# Altium PCB printer_tag_device.PcbDoc (part 1 of 3)
Units mm, origin at the board's own origin, x right, y up, seen from the top; angles counter-clockwise.
Board outline 140.18 x 100.02 mm, 2 copper layers (Top Layer, Bottom Layer); 258 components, 169 nets, 954 pads, 344 vias.
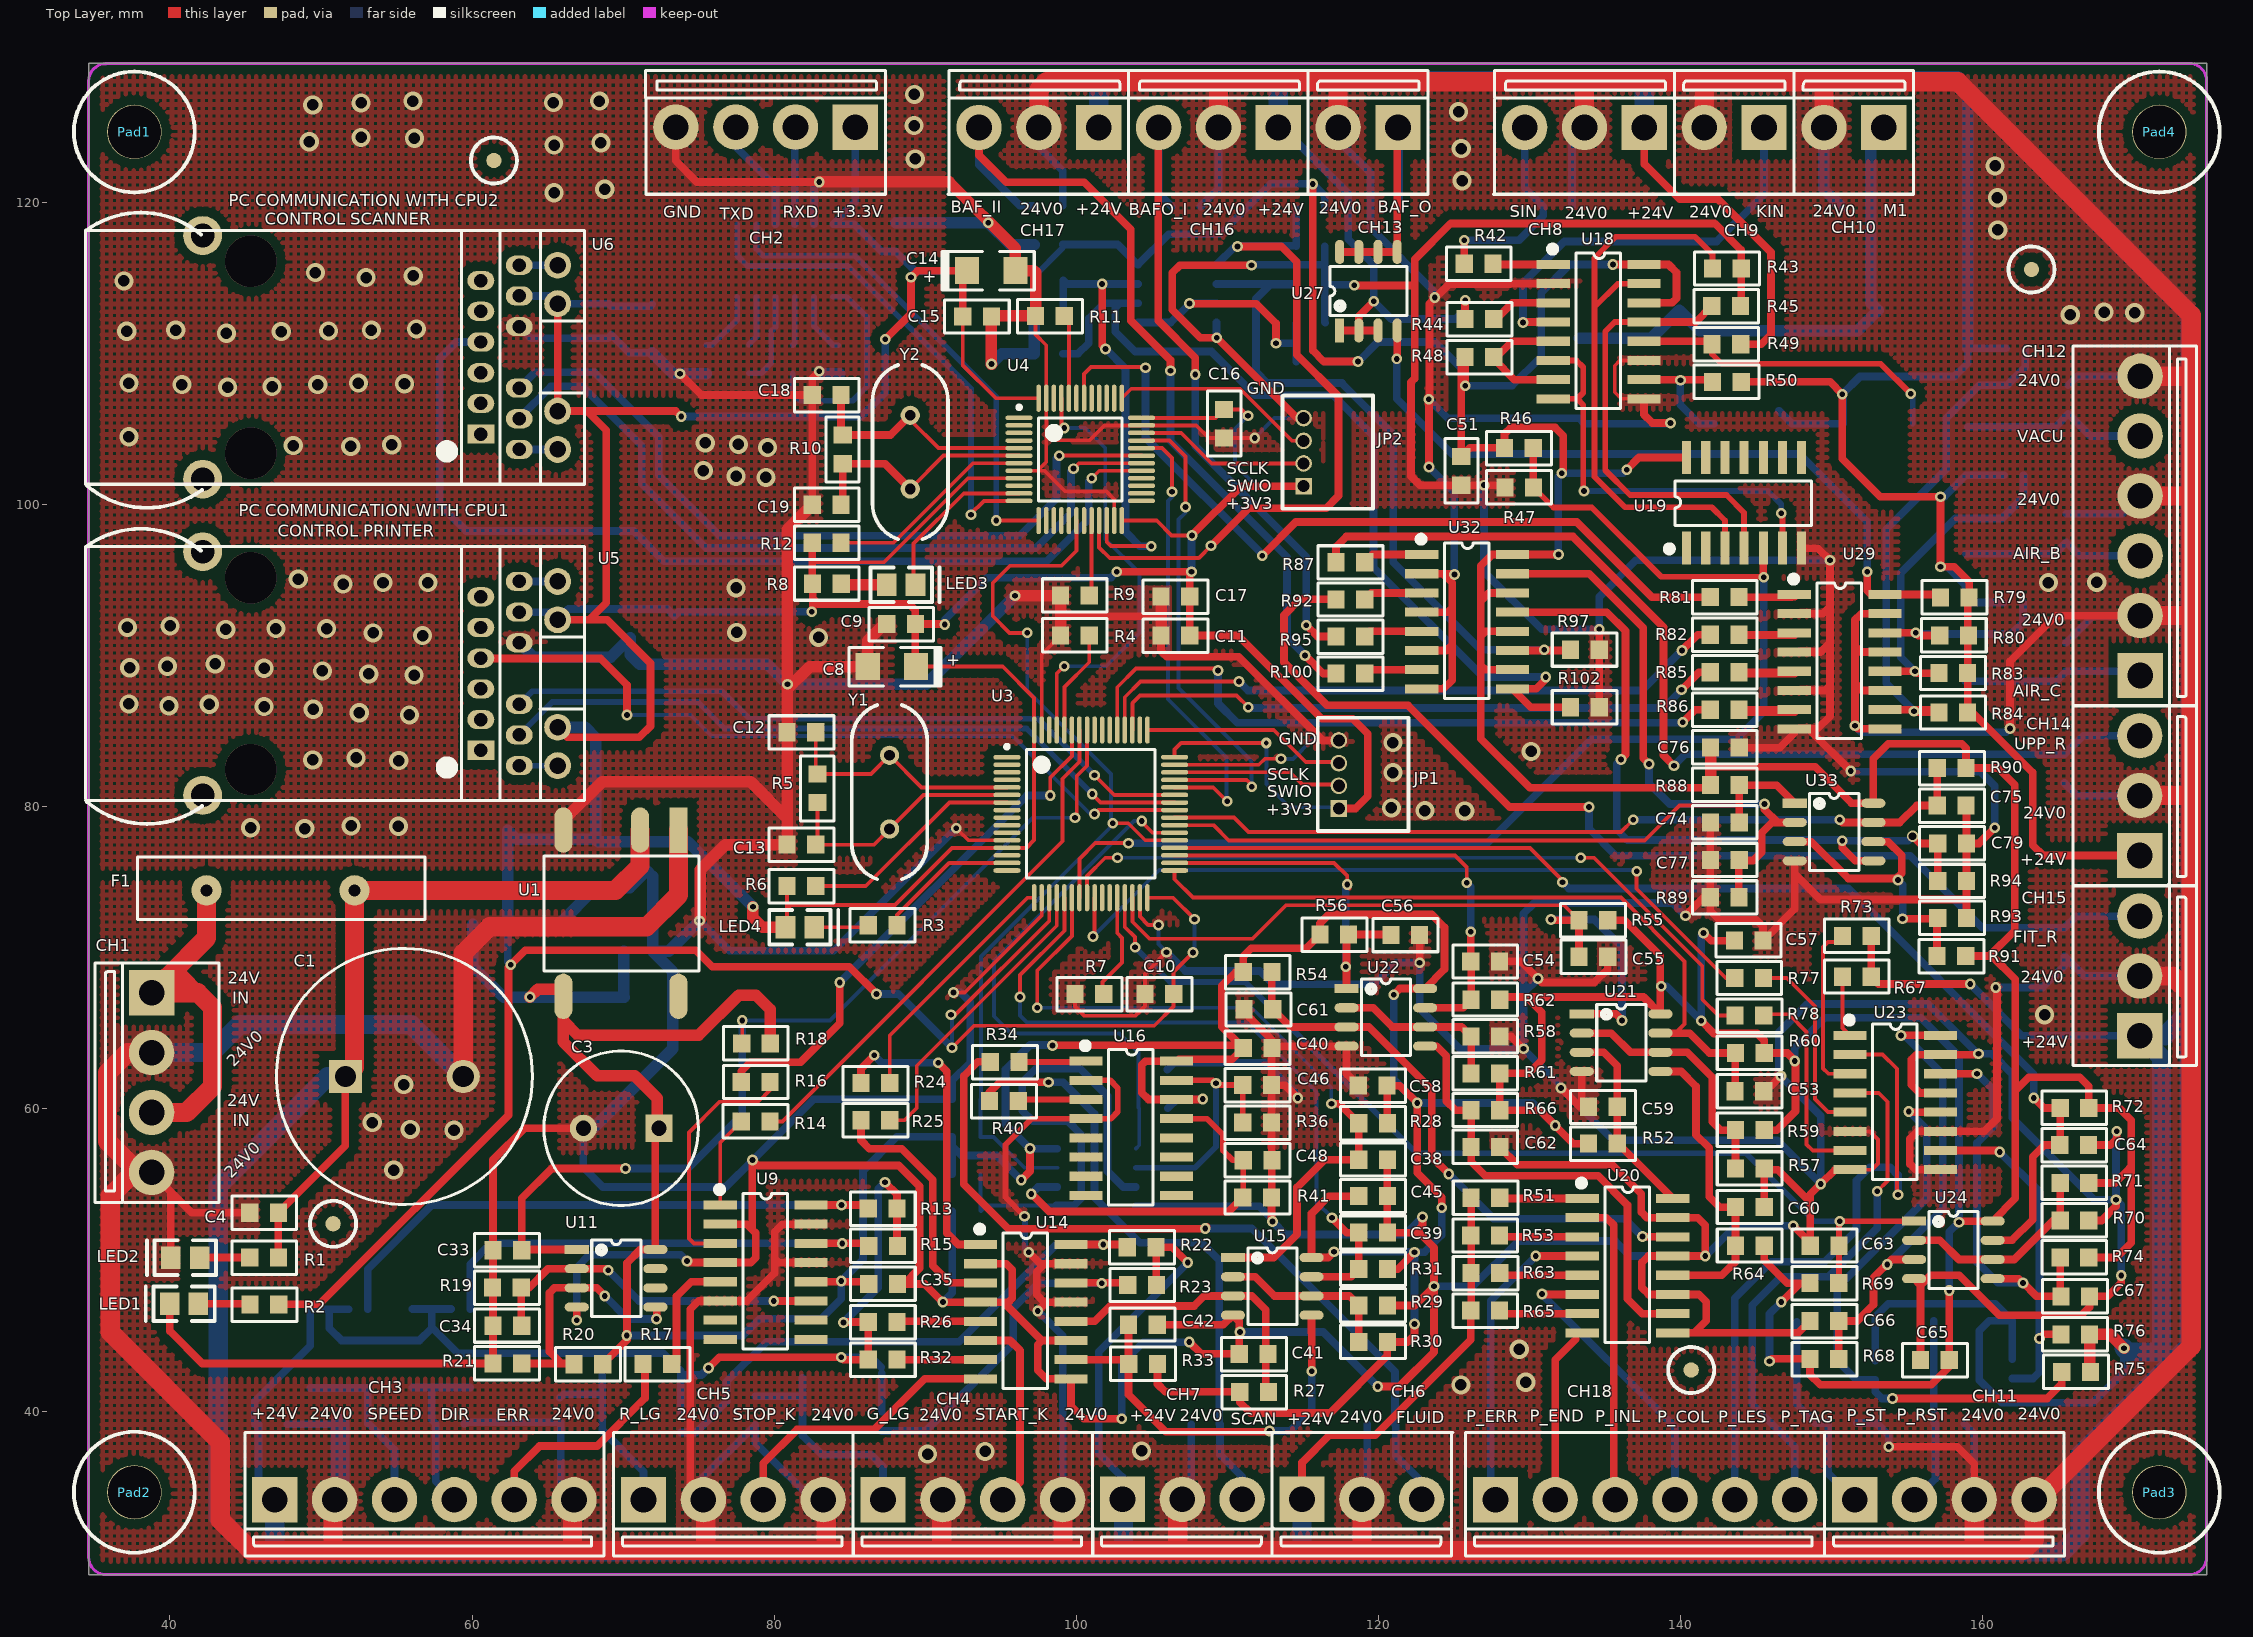
[diagram p0: Top Layer view]
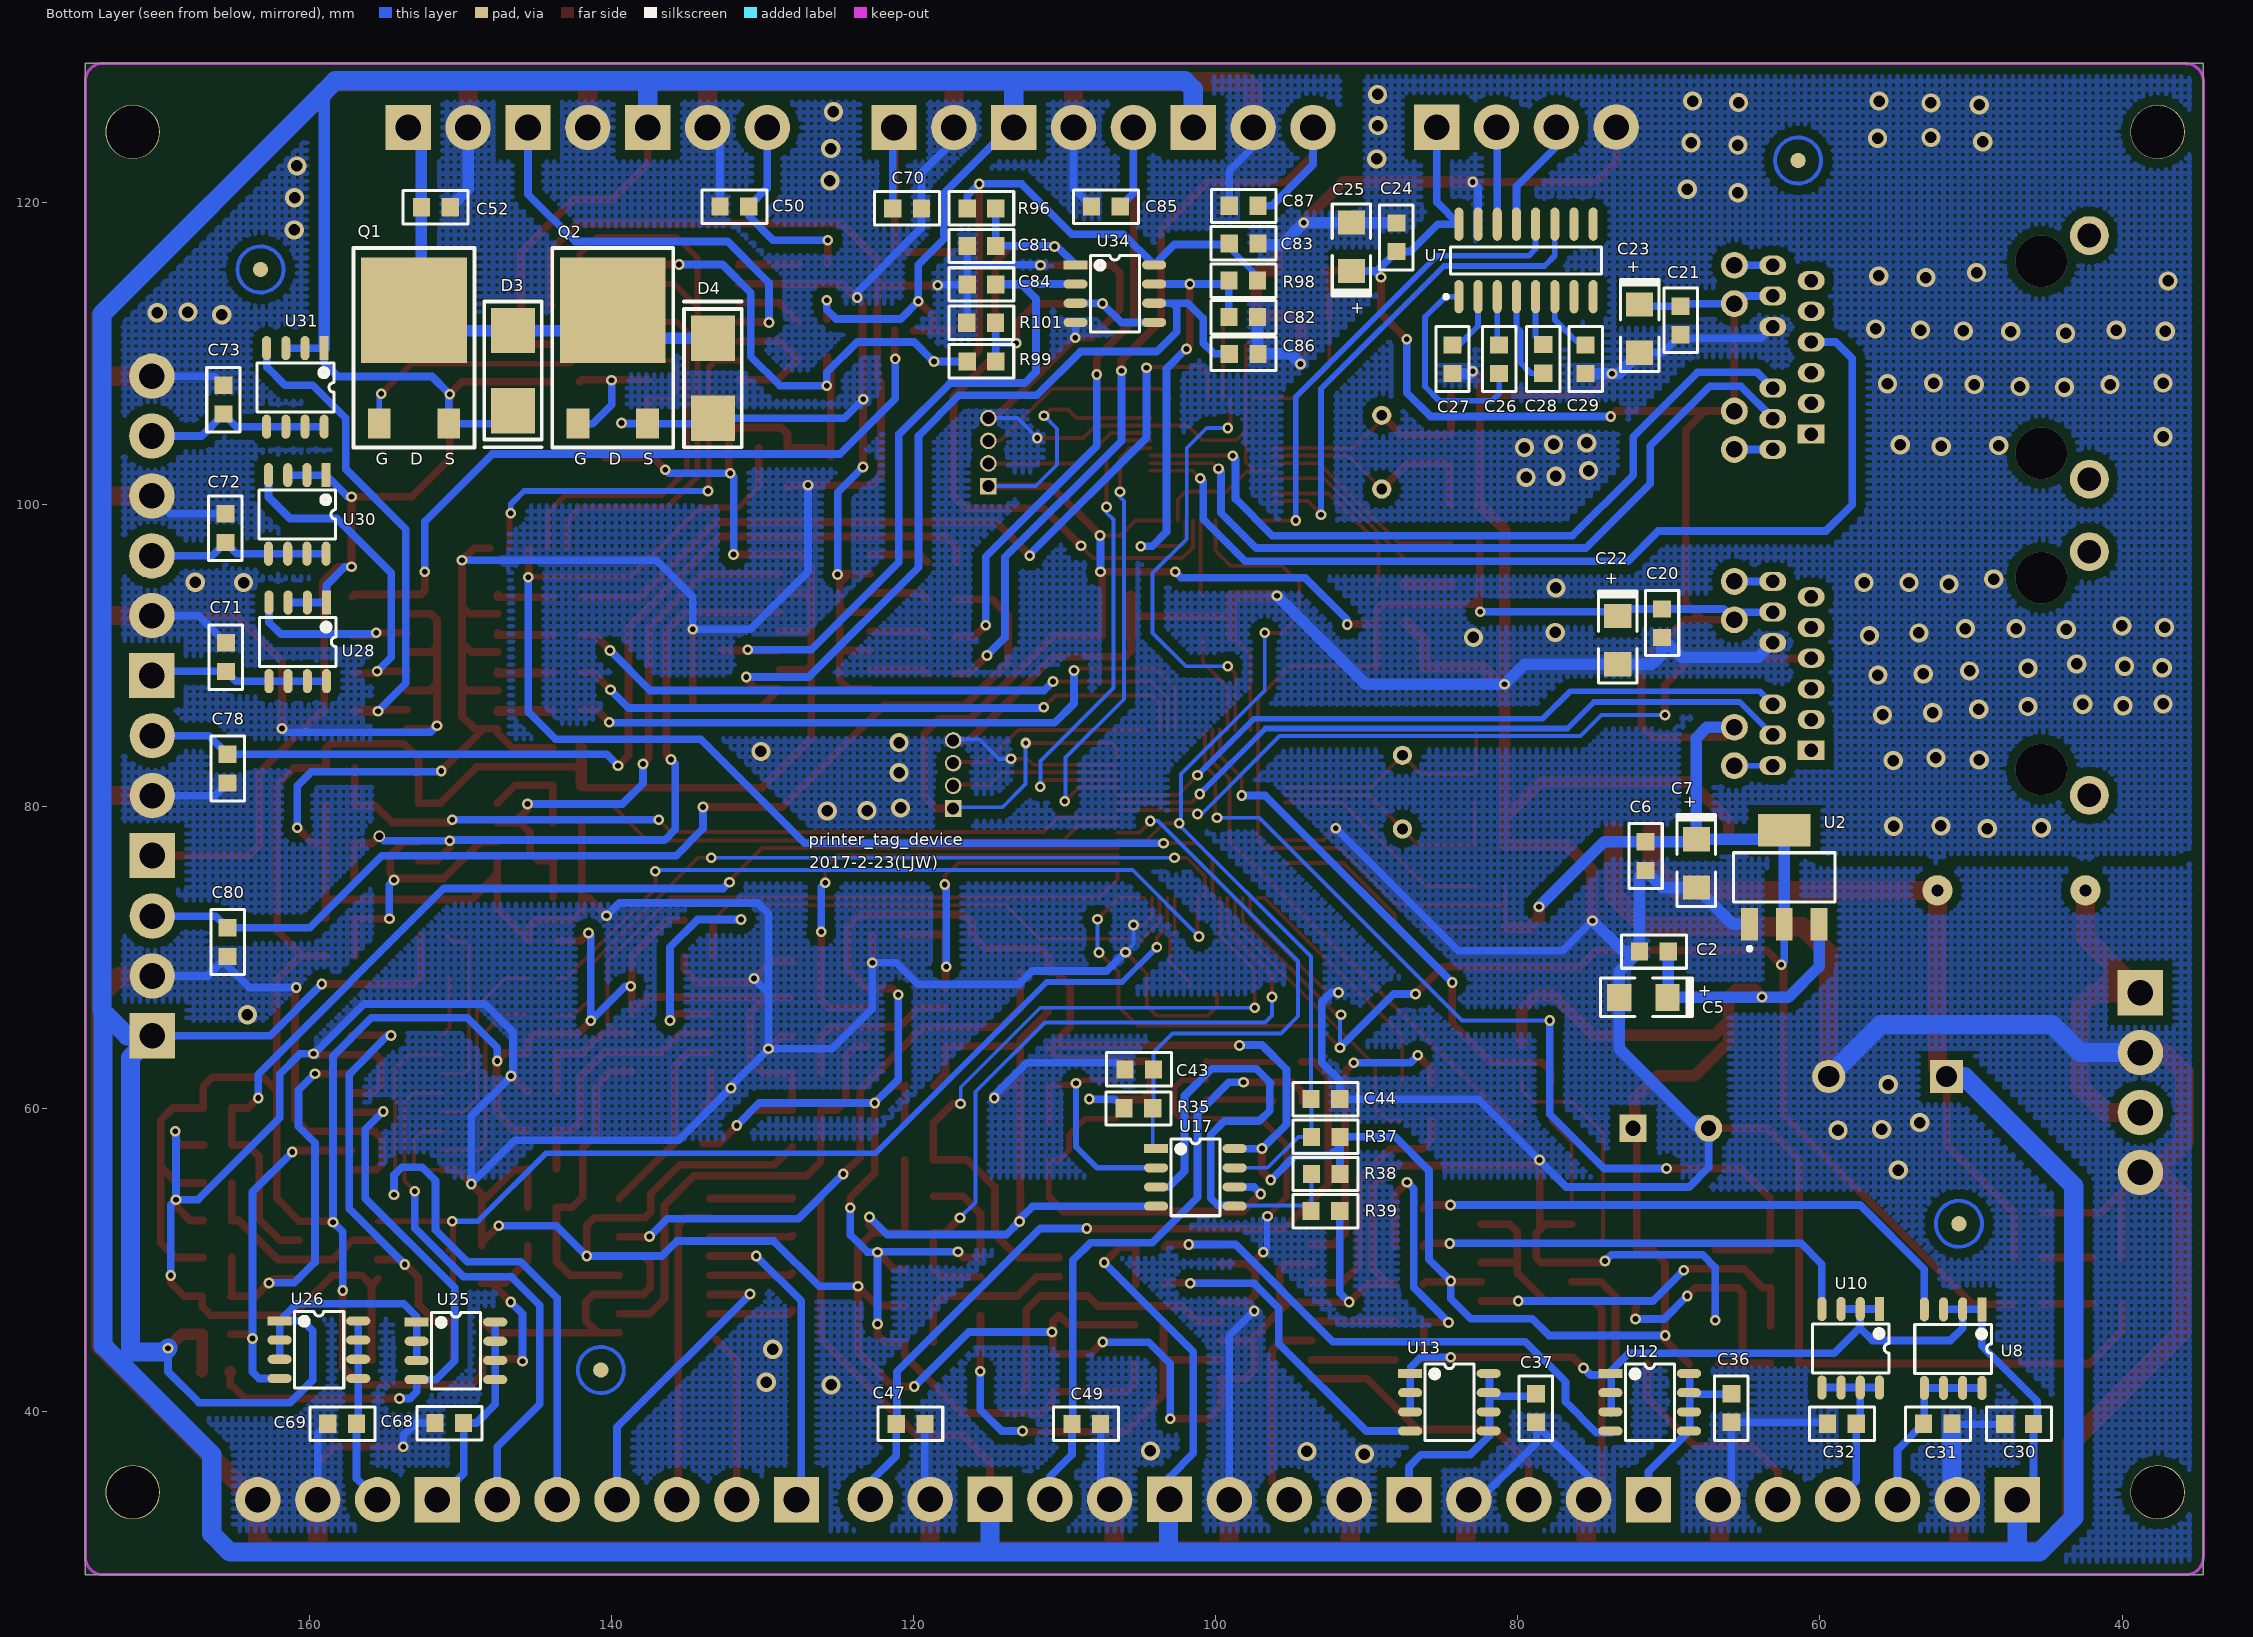
[diagram p1: Bottom Layer view, seen from below]

## Layer stack, top to bottom
Top Solder: solder mask 0.0102, Solder Resist, Dk 3.5
Top Layer: signal copper 0.0356
Dielectric 1: dielectric 0.32, FR-4, Dk 4.8
Bottom Layer: signal copper 0.0356
Bottom Solder: solder mask 0.0102, Solder Resist, Dk 3.5

## Board outline
34.62,29.185 34.62,129.204 174.803,129.204 174.803,29.185

## Design rules (kind name [scope] priority, off if disabled: settings)
Clearance Clearance_1 [InPolygon] p1: gap=0.6
Clearance [All] p2: gap=0.152
ComponentClearance [All] p1: gap=0 collisioncheckmode=3 verticalgap=0 showdistances=FALSE
PolygonConnect [All] p1: connectstyle=Direct reliefconductorwidth=0.254 reliefentries=4 polygonreliefangle="90 Angle" airgapwidth=0.254
RoutingVias [All] p1: holewidth=0.711 width=1.27 viastyle="Through Hole" minholewidth=0.711 minwidth=1.27 maxholewidth=0.711 maxwidth=1.27
SolderMaskExpansion [All] p1: expansion=0.102
Width [All] p1: maxlimit=6 minlimit=0.254 preferedwidth=6
28 further rules are at their usual default settings.

## Classes and differential pairs
component class roll_motorl_control: C50 C51 C52 CH8 CH9 CH10 D3 D4 Q1 Q2 R42 R43 R44 R45 R46 R47 R48 R49 R50 U18 U19
component class printer_control: C53 C54 C55 C56 C57 C58 C59 C60 C61 C62 C63 C64 C65 C66 C67 C68 C69 CH11 CH18 R51 R52 R53 R54 R55 R56 R57 R58 R59 R60 R61 R62 R63 R64 R65 R66 R67 R68 R69 R70 R71 R72 R73 R74 R75 R76 R77 R78 U20 U21 U22 U23 U24 U25 U26
component class power: C1 C2 C3 C4 C5 C6 C7 CH1 F1 LED1 LED2 R1 R2 U1 U2
component class light_key_control: C36 C37 C38 C39 C40 C41 C42 C43 C44 C45 C46 C47 C48 C49 CH4 CH5 CH6 CH7 R22 R23 R24 R25 R26 R27 R28 R29 R30 R31 R32 R33 R34 R35 R36 R37 R38 R39 R40 R41 U12 U13 U14 U15 U16 U17
component class cpu: C8 C9 C10 C11 C12 C13 C14 C15 C16 C17 C18 C19 JP1 JP2 LED3 LED4 Pad1 Pad2 Pad3 Pad4 R3 R4 R5 R6 R7 R8 R9 R10 R11 R12 U3 U4 Y1 Y2
component class communition: C20 C21 C22 C23 C24 C25 C26 C27 C28 C29 CH2 U5 U6 U7
component class belt_motor_control: C30 C31 C32 C33 C34 C35 CH3 R13 R14 R15 R16 R17 R18 R19 R20 R21 U8 U9 U10 U11
component class air_cylinder_control: C70 C71 C72 C73 C74 C75 C76 C77 C78 C79 C80 C81 C82 C83 C84 C85 C86 C87 CH12 CH13 CH14 CH15 CH16 CH17 R79 R80 R81 R82 R83 R84 R85 R86 R87 R88 R89 R90 R91 R92 R93 R94 R95 R96 R97 R98 R99 R100 R101 R102 U27 U28 U29 U30 U31 U32 U33 U34

## Components (designator, comment, footprint, x,y, rotation, side; value= is the part's Value field where it differs from the comment)
C1 "C_2200uF" C7.8*17 51.613,62.154 r0 top
C2 "Cap" 0805 70.993,70.434 r180 bottom
C3 "C_2200uF" C5*10 72.365,58.725 r180 top
C4 "Cap" 0805 46.228,53.137 r0 top
C5 "Cap Pol3" "CAP A-3216" 71.679,67.386 r0 bottom
C6 "Cap" 0805 71.552,76.733 r90 bottom
C7 "Cap Pol3" "CAP A-3216" 68.174,76.251 r270 bottom
C8 "Cap Pol3" "CAP A-3216" 87.782,89.281 r180 top
C9 "Cap" 0805 88.392,92.1 r0 top
C10 "Cap" 0805 105.486,67.615 r0 top
C11 "Cap" 0805 106.553,91.338 r0 top
C12 "Cap" 0805 81.8,84.938 r0 top
C13 "Cap" 0805 81.8,77.495 r0 top
C14 "Cap Pol3" "CAP A-3216" 94.361,115.494 r0 top
C15 "Cap" 0805 93.421,112.446 r180 top
C16 "Cap" 0805 109.779,105.359 r90 top
C17 "Cap" 0805 106.553,93.929 r0 top
C18 "Cap" 0805 83.464,107.264 r0 top
C19 "Cap" 0805 83.464,100 r0 top
C20 "Cap" 0805 70.46,92.151 r90 bottom
C21 "Cap" 0805 69.215,112.192 r90 bottom
C22 "Cap Pol3" "CAP A-3216" 73.381,91.034 r270 bottom
C23 "Cap Pol3" "CAP A-3216" 71.933,111.658 r270 bottom
C24 "Cap" 0805 88.036,117.704 r270 bottom
C25 "Cap Pol3" "CAP A-3216" 91.008,117.069 r90 bottom
C26 "Cap" 0805 81.229,109.626 r90 bottom
C27 "Cap" 0805 84.328,109.626 r90 bottom
C28 "Cap" 0805 78.308,109.652 r270 bottom
C29 "Cap" 0805 75.514,109.626 r90 bottom
C30 "Cap" 0805 46.812,39.141 r0 bottom
C31 "Cap" 0805 52.197,39.167 r180 bottom
C32 "Cap" 0805 58.547,39.167 r180 bottom
C33 "Cap" 0805 62.332,50.648 r180 top
C34 "Cap" 0805 62.332,45.652 r180 top
C35 "Cap" 0805 87.198,48.412 r180 top
C36 "Cap" 0805 65.862,40.208 r270 bottom
C37 "Cap" 0805 78.791,40.208 r270 bottom
C38 "Cap" 0805 119.634,56.642 r180 top
C39 "Cap" 0805 119.634,51.816 r180 top
C40 "Cap" 0805 111.989,64.033 r180 top
C41 "Cap" 0805 111.735,43.79 r0 top
C42 "Cap" 0805 104.394,45.72 r180 top
C43 "Cap" 0805 105.054,62.611 r0 bottom
C44 "Cap" 0805 92.735,60.655 r180 bottom
C45 "Cap" 0805 119.634,54.229 r180 top
C46 "Cap" 0805 111.963,61.582 r0 top
C47 "Cap" 0805 120.193,39.141 r0 bottom
C48 "Cap" 0805 111.989,56.604 r180 top
C49 "Cap" 0805 108.56,39.141 r0 bottom
C50 "Cap" 0805 131.851,119.736 r180 bottom
C51 "Cap" 0805 125.476,102.235 r90 top
C52 "Cap" 0805 151.613,119.685 r0 bottom
C53 "Cap" 0805 144.551,61.178 r0 top
C54 "Cap" 0805 127.051,69.774 r0 top
C55 "Cap" 0805 134.214,70.079 r0 top
C56 "Cap" 0805 121.768,71.526 r0 top
C57 "Cap" 0805 144.501,71.145 r180 top
C58 "Cap" 0805 119.609,61.544 r0 top
C59 "Cap" 0805 134.849,60.147 r0 top
C60 "Cap" 0805 144.577,53.503 r180 top
C61 "Cap" 0805 112.039,66.599 r0 top
C62 "Cap" 0805 127.076,57.48 r180 top
C63 "Cap" 0805 149.53,50.952 r180 top
C64 "Cap" 0805 166.04,57.612 r0 top
C65 "Cap" 0805 156.82,43.383 r0 top
C66 "Cap" 0805 149.504,45.966 r0 top
C67 "Cap" 0805 166.116,47.6 r180 top
C68 "Cap" 0805 150.724,39.218 r180 bottom
C69 "Cap" 0805 157.81,39.167 r180 bottom
C70 "Cap" 0805 120.421,119.609 r0 bottom
C71 "Cap" 0805 165.506,89.916 r270 bottom
C72 "Cap" 0805 165.532,98.45 r270 bottom
C73 "Cap" 0805 165.659,106.959 r270 bottom
C74 "Cap" 0805 142.926,78.956 r180 top
C75 "Cap" 0805 157.937,80.086 r0 top
C76 "Cap" 0805 142.926,83.922 r180 top
C77 "Cap" 0805 142.926,76.473 r180 top
C78 "Cap" 0805 165.405,82.525 r90 bottom
C79 "Cap" 0805 157.963,77.572 r180 top
C80 "Cap" 0805 165.405,71.044 r90 bottom
C81 "Cap" 0805 115.494,117.113 r0 bottom
C82 "Cap" 0805 98.171,112.42 r180 bottom
C83 "Cap" 0805 98.146,117.297 r0 bottom
C84 "Cap" 0805 115.494,114.567 r0 bottom
C85 "Cap" 0805 107.264,119.736 r180 bottom
C86 "Cap" 0805 98.146,109.982 r0 bottom
C87 "Cap" 0805 98.146,119.786 r180 bottom
CH1 "HEADER1X4" CH3.96-4PIN 38.786,67.691 r270 top
CH2 "HEADER1X6" CH3.96-4PIN 85.369,124.993 r180 top locked
CH3 "HEADER1X6" CH3.96-6PIN 46.939,34.163 r0 top locked
CH4 "HEADER1X4" CH3.96-4PIN 87.198,34.138 r0 top locked
CH5 "HEADER1X4" CH3.96-4PIN 71.349,34.138 r0 top locked
CH6 "HEADER1X3" CH3.96-3PIN 114.935,34.163 r0 top locked
CH7 "HEADER1X3" CH3.96-3PIN 103.048,34.163 r0 top locked
CH8 "HEADER1X3" CH3.96-3PIN 137.592,124.968 r180 top locked
CH9 "HEADER1X2" CH3.96-2PIN 145.517,124.968 r180 top locked
CH10 "HEADER1X2" CH3.96-2PIN 153.441,124.968 r180 top locked
CH11 "HEADER1X4" CH3.96-4PIN 151.511,34.138 r0 top locked
CH12 "HEADER1X6" CH3.96-6PIN 170.383,88.697 r90 top
CH13 "HEADER1X2" CH3.96-2PIN 121.285,124.968 r180 top locked
CH14 "HEADER1X3" CH3.96-3PIN 170.383,76.784 r90 top
CH15 "HEADER1X3" CH3.96-3PIN 170.383,64.846 r90 top
CH16 "HEADER1X3" CH3.96-3PIN 113.36,124.968 r180 top locked
CH17 "HEADER1X3" CH3.96-3PIN 101.473,124.968 r180 top locked
CH18 "HEADER1X6" CH3.96-6PIN 127.737,34.163 r0 top locked
D3 "1N5822(SS34)" SMA 146.507,111.529 r270 bottom (schematic designator D2)
D4 "1N5822(SS34)" SMA 133.274,105.721 r90 bottom (schematic designator D3)
F1 "X30_UF500" X30UF600 42.418,74.473 r0 top
JP1 "4 HEADER" CON4_1.5 117.373,82.144 r90 top
JP2 "4 HEADER" CON4_1.5 115.037,103.48 r90 top
LED1 "" LED-0805 41.885,47.117 r180 top
LED2 "" LED-0805 41.961,50.165 r180 top
LED3 "" LED-0805 87.452,94.691 r0 top
LED4 "Ready" LED-0805 80.747,72.034 r0 top
Pad1 "Pad" pad35 37.617,124.675 r0 top
Pad2 "Pad" pad35 37.617,34.632 r0 top
Pad3 "Pad" pad35 171.653,34.632 r0 top
Pad4 "Pad" pad35 171.653,124.675 r0 top
Q1 "FR5305 (PMOS-2)" TO-252 153.06,109.118 r180 bottom
Q2 "FR4105 (NMOS-2)" TO-252 139.903,109.118 r180 bottom
R1 "Res2" 0805 46.228,50.165 r0 top
R2 "Res2" 0805 46.253,47.066 r0 top
R3 "Res2" 0805 87.173,72.161 r180 top
R4 "Res2" 0805 99.898,91.338 r180 top
R5 "Res2" 0805 82.867,81.229 r270 top
R6 "Res2" 0805 81.8,74.752 r0 top
R7 "Res2" 0805 100.863,67.615 r0 top
R8 "Res2" 0805 83.49,94.767 r180 top
R9 "Res2" 0805 99.898,93.98 r180 top
R10 "Res2" 0805 84.531,103.657 r270 top
R11 "Res2" 0805 98.247,112.497 r0 top
R12 "Res2" 0805 83.464,97.485 r0 top
R13 "Res2" 0805 87.173,53.416 r0 top
R14 "Res2" 0805 78.765,59.182 r180 top
R15 "Res2" 0805 87.198,50.927 r180 top
R16 "Res2" 0805 78.765,61.798 r0 top
R17 "Res2" 0805 72.263,43.129 r0 top
R18 "Res2" 0805 78.791,64.338 r180 top
R19 "Res2" 0805 62.306,48.175 r0 top
R20 "Res2" 0805 67.691,43.104 r180 top
R21 "Res2" 0805 62.332,43.155 r180 top
R22 "Res2" 0805 104.318,50.851 r0 top
R23 "Res2" 0805 104.343,48.362 r0 top
R24 "Res2" 0805 86.69,61.722 r0 top
R25 "Res2" 0805 86.69,59.258 r0 top
R26 "Res2" 0805 87.173,45.898 r0 top
R27 "Res2" 0805 111.76,41.275 r0 top
R28 "Res2" 0805 119.634,59.055 r180 top
R29 "Res2" 0805 119.634,46.99 r180 top
R30 "Res2" 0805 119.634,44.577 r180 top
R31 "Res2" 0805 119.634,49.403 r180 top
R32 "Res2" 0805 87.173,43.409 r0 top
R33 "Res2" 0805 104.419,43.129 r180 top
R34 "Res2" 0805 95.25,63.119 r0 top
R35 "Res2" 0805 105.105,60.046 r180 bottom
R36 "Res2" 0805 111.963,59.106 r0 top
R37 "Res2" 0805 92.71,58.158 r0 bottom
R38 "Res2" 0805 92.71,55.685 r0 bottom
R39 "Res2" 0805 92.735,53.238 r180 bottom
R40 "Res2" 0805 95.199,60.528 r0 top
R41 "Res2" 0805 111.963,54.153 r0 top
R42 "Res2" 0805 126.619,115.951 r0 top
R43 "Res2" 0805 143.053,115.646 r0 top
R44 "Res2" 0805 126.67,112.293 r0 top
R45 "Res2" 0805 143.002,113.157 r0 top
R46 "Res2" 0805 129.286,103.759 r0 top
R47 "Res2" 0805 129.311,101.143 r180 top
R48 "Res2" 0805 126.67,109.779 r0 top
R49 "Res2" 0805 143.027,110.617 r180 top
R50 "Res2" 0805 143.053,108.128 r180 top
R51 "Res2" 0805 127.076,54.127 r0 top
R52 "Res2" 0805 134.849,57.709 r0 top
R53 "Res2" 0805 127.051,51.638 r0 top
R54 "Res2" 0805 111.989,69.063 r0 top
R55 "Res2" 0805 134.214,72.492 r180 top
R56 "Res2" 0805 117.069,71.552 r0 top
R57 "Res2" 0805 144.577,56.053 r180 top
R58 "Res2" 0805 127.076,64.795 r180 top
R59 "Res2" 0805 144.577,58.603 r180 top
R60 "Res2" 0805 144.577,63.703 r180 top
R61 "Res2" 0805 127.076,62.357 r180 top
R62 "Res2" 0805 127.076,67.234 r180 top
R63 "Res2" 0805 127.076,49.149 r0 top
R64 "Res2" 0805 144.577,50.952 r180 top
R65 "Res2" 0805 127.051,46.66 r0 top
R66 "Res2" 0805 127.076,59.919 r180 top
R67 "Res2" 0805 151.663,68.758 r180 top
R68 "Res2" 0805 149.504,43.459 r0 top
R69 "Res2" 0805 149.504,48.472 r0 top
R70 "Res2" 0805 166.065,52.619 r180 top
R71 "Res2" 0805 166.065,55.103 r180 top
R72 "Res2" 0805 166.065,60.071 r180 top
R73 "Res2" 0805 151.663,71.45 r180 top
R74 "Res2" 0805 166.065,50.165 r180 top
R75 "Res2" 0805 166.167,42.596 r180 top
R76 "Res2" 0805 166.116,45.085 r180 top
R77 "Res2" 0805 144.526,68.682 r0 top
R78 "Res2" 0805 144.551,66.192 r0 top
R79 "Res2" 0805 158.14,93.853 r180 top
R80 "Res2" 0805 158.09,91.338 r180 top
R81 "Res2" 0805 142.9,93.878 r0 top
R82 "Res2" 0805 142.9,91.396 r0 top
R83 "Res2" 0805 158.039,88.849 r180 top
R84 "Res2" 0805 158.039,86.233 r180 top
R85 "Res2" 0805 142.9,88.913 r0 top
R86 "Res2" 0805 142.9,86.43 r0 top
R87 "Res2" 0805 118.135,96.19 r0 top
R88 "Res2" 0805 142.926,81.439 r180 top
R89 "Res2" 0805 142.9,74.016 r0 top
R90 "Res2" 0805 157.937,82.575 r0 top
R91 "Res2" 0805 157.912,70.129 r0 top
R92 "Res2" 0805 118.135,93.734 r0 top
R93 "Res2" 0805 157.963,72.644 r180 top
R94 "Res2" 0805 157.963,75.082 r180 top
R95 "Res2" 0805 118.135,91.279 r0 top
R96 "Res2" 0805 115.494,119.609 r0 bottom
R97 "Res2" 0805 133.655,90.399 r180 top
R98 "Res2" 0805 98.171,114.833 r180 bottom
R99 "Res2" 0805 115.494,109.474 r0 bottom
R100 "Res2" 0805 118.135,88.824 r0 top
R101 "Res2" 0805 115.519,112.046 r180 bottom
R102 "Res2" 0805 133.655,86.589 r180 top
U1 "B2405XT-2WR2" B2405XT-2WR2 73.66,78.461 r270 top
U2 "AMS1117-3.3" SOT223 62.357,75.336 r180 bottom
U3 "STM32F103RBT6" LQFP64 95.402,83.287 r0 top
U4 "STM32F103C8T6" LQFP48 100.254,102.997 r0 top
U5 "USR-K3" USR-K3 60.579,83.744 r180 top
U6 "USR-K3" USR-K3 60.579,104.673 r180 top
U7 "MAX3232ESE" NSO16_N 83.896,113.767 r90 bottom
U8 "CEM4435A" SOP8-OP27 49.276,46.736 r270 bottom
U9 "TLP280-4" SO16 79.426,49.2 r0 top
U10 "CEM4435A" SOP8-OP27 56.058,46.761 r270 bottom
U11 "LM293" SOP8-OP27 66.929,50.698 r0 top
U12 "CEM4435A" SOP8-OP27 73.863,42.494 r180 bottom
U13 "CEM4435A" SOP8-OP27 87.122,42.494 r180 bottom
U14 "TLP280-4" SO16 96.647,46.584 r0 top
U15 "LM293" SOP8-OP27 110.363,50.165 r0 top
U16 "TLP280-4" SO16 103.632,58.725 r0 top
U17 "LM293" SOP8-OP27 103.937,57.379 r180 bottom
U18 "TLP280-4" SO16 134.569,111.455 r0 top
U19 "74HC10" SO14 144.196,100.127 r90 top
U20 "TLP280-4" SO16 136.474,49.632 r0 top
U21 "LM293" SOP8-OP27 133.452,66.294 r0 top
U22 "LM293" SOP8-OP27 117.881,67.97 r0 top
U23 "TLP280-4" SO16 154.203,60.427 r0 top
U24 "LM293" SOP8-OP27 155.448,52.578 r0 top
U25 "CEM4435A" SOP8-OP27 152.883,45.898 r180 bottom
U26 "CEM4435A" SOP8-OP27 161.95,45.974 r180 bottom
U27 "CEM4435A" SOP8-OP27 117.424,111.531 r90 top
U28 "CEM4435A" SOP8-OP27 158.852,93.523 r270 bottom
U29 "TLP280-4" SO16 150.52,89.611 r0 top
U30 "CEM4435A" SOP8-OP27 158.877,101.956 r270 bottom
U31 "CEM4435A" SOP8-OP27 159.004,110.363 r270 bottom
U32 "TLP280-4" SO16 125.857,92.253 r0 top
U33 "LM293" SOP8-OP27 147.549,80.239 r0 top
U34 "LM293" SOP8-OP27 109.271,115.875 r180 bottom
Y1 "8MHz" XTAL_US 87.63,83.414 r270 top
Y2 "8MHz" XTAL_US 89.002,105.918 r270 top

## Footprints (in the part's own frame and the unit in brackets; to place one, negate y for a bottom-side part, rotate by r counter-clockwise, add the part's x,y. Pads: shape width x height; smd on the part's side, far side on the other; paste and mask are expansions set on the pad)
0805 [mm] "1.14mm,1.2mm,3.05mm"
  rect 1.14x1.2 smd: 1(-0.95,0) 2(0.95,0)
  silkscreen extent -2.13,-1.12 2.16,1.09
B2405XT-2WR2 [mm]
  rect 3x1.2 smd: 1(0,0)
  oval 3x1.2 smd: 2(0,-2.54) 4(0,-7.62) 5(11,-7.62) 8(11,0)
  silkscreen extent 1.73,-8.89 9.32,1.37
C5*10 [mm]
  rect 1.8x1.8 hole 1: 1(0,0)
  round 1.8 hole 1: 2(5,0)
  silkscreen extent -2.62,-5.11 7.62,5.11
C7.8*17 [mm]
  rect 2.2x2.2 hole 1.4: 1(0,0)
  round 2.2 hole 1.4: 2(7.8,0)
  silkscreen extent -4.57,-8.47 12.37,8.47
"CAP A-3216" [mm]
  rect 1.6x1.8 smd: 1(-1.6,0) 2(1.6,0)
  silkscreen extent -3.25,-1.27 2.85,1.27
CH3.96-2PIN [mm]
  rect 3x3 hole 1.7: 1(0,0)
  round 3 hole 1.7: 2(3.96,0)
  silkscreen extent -1.98,-3.76 5.94,4.42
CH3.96-3PIN [mm]
  rect 3x3 hole 1.7: 1(0,0)
  round 3 hole 1.7: 2(3.96,0) 3(7.92,0)
  silkscreen extent -1.98,-3.76 9.98,4.42
CH3.96-4PIN [mm]
  rect 3x3 hole 1.7: 1(0,0)
  round 3 hole 1.7: 2(3.96,0) 3(7.92,0) 4(11.887,0)
  silkscreen extent -1.98,-3.73 13.89,4.45
CH3.96-6PIN [mm]
  rect 3x3 hole 1.7: 1(0,-0.025)
  round 3 hole 1.7: 2(3.96,-0.025) 3(7.92,-0.025) 4(11.887,-0.025) 5(15.847,-0.025) 6(19.807,-0.025)
  silkscreen extent -1.98,-3.76 21.79,4.42
CON4_1.5 [mm]
  rect 1.1x1.1 hole 0.8: 1(-2.25,0)
  round 1.1 hole 0.8: 2(-0.75,0) 3(0.75,0) 4(2.25,0)
  silkscreen extent -3.75,-4.6 3.75,1.4
LED-0805 [mm]
  rect 1.3x1.5 smd: 1(0,0) 2(1.9,0)
  silkscreen extent -1.08,-1.14 3.49,1.14
LQFP48 [mm]
  oval 1.8x0.3 smd: 1(-4.05,2.75) 2(-4.05,2.25) 3(-4.05,1.75) 4(-4.05,1.25) 5(-4.05,0.75) 6(-4.05,0.25) 7(-4.05,-0.25) 8(-4.05,-0.75) 9(-4.05,-1.25) 10(-4.05,-1.75) 11(-4.05,-2.25) 12(-4.05,-2.75) 25(4.05,-2.75) 26(4.05,-2.25) 27(4.05,-1.75) 28(4.05,-1.25) 29(4.05,-0.75) 30(4.05,-0.25) 31(4.05,0.25) 32(4.05,0.75) 33(4.05,1.25) 34(4.05,1.75) 35(4.05,2.25) 36(4.05,2.75)
  oval 0.3x1.8 smd: 13(-2.75,-4.05) 14(-2.25,-4.05) 15(-1.75,-4.05) 16(-1.25,-4.05) 17(-0.75,-4.05) 18(-0.25,-4.05) 19(0.25,-4.05) 20(0.75,-4.05) 21(1.25,-4.05) 22(1.75,-4.05) 23(2.25,-4.05) 24(2.75,-4.05) 37(2.75,4.05) 38(2.25,4.05) 39(1.75,4.05) 40(1.25,4.05) 41(0.75,4.05) 42(0.25,4.05) 43(-0.25,4.05) 44(-0.75,4.05) 45(-1.25,4.05) 46(-1.75,4.05) 47(-2.25,4.05) 48(-2.75,4.05)
  silkscreen extent -4.17,-2.75 2.75,3.57, body extent -3.5,-3.5 3.5,3.5, height 1.6
LQFP64 [mm] "Thin QFP, 64-Leads, Body 10x10mm, Pitch 0.5mm, IPC Medium Density"
  oval 1.8x0.3 smd: 1(0,0) 2(0,-0.5) 3(0,-1) 4(0,-1.5) 5(0,-2) 6(0,-2.5) 7(0,-3) 8(0,-3.5) 9(0,-4) 10(0,-4.5) 11(0,-5) 12(0,-5.5) 13(0,-6) 14(0,-6.5) 15(0,-7) 16(0,-7.5) 33(11.1,-7.5) 34(11.1,-7) 35(11.1,-6.5) 36(11.1,-6) 37(11.1,-5.5) 38(11.1,-5) 39(11.1,-4.5) 40(11.1,-4) 41(11.1,-3.5) 42(11.1,-3) 43(11.1,-2.5) 44(11.1,-2) 45(11.1,-1.5) 46(11.1,-1) 47(11.1,-0.5) 48(11.1,0)
  oval 0.3x1.8 smd: 17(1.8,-9.3) 18(2.3,-9.3) 19(2.8,-9.3) 20(3.3,-9.3) 21(3.8,-9.3) 22(4.3,-9.3) 23(4.8,-9.3) 24(5.3,-9.3) 25(5.8,-9.3) 26(6.3,-9.3) 27(6.8,-9.3) 28(7.3,-9.3) 29(7.8,-9.3) 30(8.3,-9.3) 31(8.8,-9.3) 32(9.3,-9.3) 49(9.3,1.8) 50(8.8,1.8) 51(8.3,1.8) 52(7.8,1.8) 53(7.3,1.8) 54(6.8,1.8) 55(6.3,1.8) 56(5.8,1.8) 57(5.3,1.8) 58(4.8,1.8) 59(4.3,1.8) 60(3.8,1.8) 61(3.3,1.8) 62(2.8,1.8) 63(2.3,1.8) 64(1.8,1.8)
  silkscreen extent -0.12,-8 9.8,0.82, body extent 0.55,-8.75 10.55,1.25, height 1.6
NSO16_N [mm]
  oval 2.2x0.6 smd: 1(0,0) 2(0,-1.27) 3(0,-2.54) 4(0,-3.81) 5(0,-5.08) 6(0,-6.35) 7(0,-7.62) 8(0,-8.89) 9(4.8,-8.89) 10(4.8,-7.62) 11(4.8,-6.35) 12(4.8,-5.08) 13(4.8,-3.81) 14(4.8,-2.54) 15(4.8,-1.27) 16(4.8,0)
  silkscreen extent -0.12,-9.45 3.3,0.98, body extent 0.45,-9.4 4.35,0.51, height 1.75
pad35 [mm]
  round 3.6 hole 3.5: 1(0.025,0)
  silkscreen extent -3.97,-4 4.03,4
SMA [mm]
  rect 3x2.9 smd: 1(0,0) 2(5.3,0)
  silkscreen extent -1.92,-1.91 7.73,1.91
SO14 [mm] "Wide = 6mm"
  rect 2.2x0.6 smd: 1(-3,3.81) 2(-3,2.54) 3(-3,1.27) 4(-3,0) 5(-3,-1.27) 6(-3,-2.54) 7(-3,-3.81) 8(3,-3.81) 9(3,-2.54) 10(3,-1.27) 11(3,0) 12(3,1.27) 13(3,2.54) 14(3,3.81)
  silkscreen extent -3.23,-4.44 1.45,5.13
SO16 [mm] "Wide = 6mm"
  rect 2.2x0.6 smd: 1(-3,4.445) 2(-3,3.175) 3(-3,1.905) 4(-3,0.635) 5(-3,-0.635) 6(-3,-1.905) 7(-3,-3.175) 8(-3,-4.445) 9(3,-4.445) 10(3,-3.175) 11(3,-1.905) 12(3,-0.635) 13(3,0.635) 14(3,1.905) 15(3,3.175) 16(3,4.445)
  silkscreen extent -3.23,-5.08 1.45,5.64
SOP8-OP27 [mm]
  rect 1.6x0.6 smd: 1(0,0)
  oval 1.6x0.6 smd: 2(0,-1.27) 3(0,-2.54) 4(0,-3.81) 5(5.2,-3.81) 6(5.2,-2.54) 7(5.2,-1.27) 8(5.2,0)
  silkscreen extent 0.99,-4.45 4.24,0.63
SOT223 [mm] "SOT-223/SC-73; 4 Leads; Body 6.7 x 7.3 mm, inc. leads (LxW max)"
  rect 1.1x2.15 smd: 1(-2.3,-3.1) 2(0,-3.1) 3(2.3,-3.1)
  rect 3.5x2.15 smd: 4(0,3.1)
  silkscreen extent -3.35,-4.85 3.35,1.63
TO-252 [mm]
  rect 1.5x2 smd: 1(-2.3,-3.75) 3(2.3,-3.75)
  rect 7x7 smd: 2(0,3.75)
  silkscreen extent -4,-5.32 4,7.87
USR-K3 [mil]
  rect 70x50 hole 35: 1(0,0)
  oval 70x50 hole 35: 2(0,-80) 3(0,-160) 4(0,-240) 5(0,-320) 6(0,-400) 7(-100,40) 8(-100,-40) 9(-100,-120) 10(-100,-280) 11(-100,-360) 12(-100,-440)
  round 70 hole 43: 13(-200,40) 14(-200,-60) 15(-200,-340) 16(-200,-440)
  round 101.18 hole 61.81: 17(725,117.5) 17(725,-517.5)
  silkscreen extent -270,-577 1030,192
X30UF600 [mm]
  round 2 hole 0.8: 1(0,0) 2(9.804,0)
  silkscreen extent -4.57,-1.93 14.45,2.21
XTAL_US [mil]
  round 50 hole 28: 1(0,0) 2(192.13,0)
  silkscreen extent -131,-98 323,98

## Part data
C2 C4 C6 C9 C10 C11 C12 C13 C15 C16 C17 C18 C19 C20 C21 C24 C26 C27 C28 C29 C30 C31 C32 C33 C34 C35 C36 C37 C38 C39 C40 C41 C42 C43 C44 C45 C46 C47 C48 C49 C50 C51 C52 C53 C54 C55 C56 C57 C58 C59 C60 C61 C62 C63 C64 C65 C66 C67 C68 C69 C70 C71 C72 C73 C74 C75 C76 C77 C78 C79 C80 C81 C82 C83 C84 C85 C86 C87: "Capacitor"
C5 C7 C8 C14 C22 C23 C25: "Polarized Capacitor (Surface Mount)"
CH2: library part HEADER1X4
D3 D4: library part "Diode 1N4148", "High Conductance Fast Diode"
F1: library part "Fuse 1", "Fuse"
JP1 JP2: "4 Pin Header"
LED1 LED2 LED3 LED4: library part LED2, "Typical RED, GREEN, YELLOW, AMBER GaAs LED"
Q1: library part PMOS-2, "P-Channel Power MOSFET"
Q2: library part NMOS-2, "N-Channel Power MOSFET"
R1 R2 R3 R4 R5 R6 R7 R8 R9 R10 R11 R12 R13 R14 R15 R16 R17 R18 R19 R20 R21 R22 R23 R24 R25 R26 R27 R28 R29 R30 R31 R32 R33 R34 R35 R36 R37 R38 R39 R40 R41 R42 R43 R44 R45 R46 R47 R48 R49 R50 R51 R52 R53 R54 R55 R56 R57 R58 R59 R60 R61 R62 R63 R64 R65 R66 R67 R68 R69 R70 R71 R72 R73 R74 R75 R76 R77 R78 R79 R80 R81 R82 R83 R84 R85 R86 R87 R88 R89 R90 R91 R92 R93 R94 R95 R96 R97 R98 R99 R100 R101 R102: "Resistor"
U2: library part AMS1117-5
U3: library part STM32F103RDT6
U9 U14 U16 U18 U20 U23 U29 U32: library part TLP521-4
U19: "three input nand gain"
Y1 Y2: library part XTAL, "Crystal Oscillator"

## Free pads (board coordinates)
  round 1.016 smd: 0(50.8,52.4) 0(61.443,122.784) 0(140.691,42.723) 0(163.22,115.57)
  round 1.016 smd far side: 0(50.8,52.4) 0(61.443,122.784) 0(140.691,42.723) 0(163.22,115.57)
  round 3.048 on Top Solder: 1(50.8,52.4) 1(61.443,122.784) 1(140.691,42.723) 1(163.22,115.57)
  round 3.048 on Bottom Solder: 1(50.8,52.4) 1(61.443,122.784) 1(140.691,42.723) 1(163.22,115.57)

## Via types
v1: diameter 0.711, hole 0.381, Top Layer to Bottom Layer, 231 vias
v2: diameter 1.27, hole 0.762, Top Layer to Bottom Layer, 107 vias
v3: diameter 3.4, hole 3.4, Top Layer to Bottom Layer, 4 vias
v4: diameter 0.711, hole 0.305, Top Layer to Bottom Layer, 1 vias
v5: diameter 0.762, hole 0.508, Top Layer to Bottom Layer, 1 vias

## Nets (pads, with @x,y where several pads share a name; then routed paths per layer and width w, separated by ;. In a path a pad name is that pad's centre, name@x,y a point inside that pad or via, vN(x,y) a via of type N, cw(c..) or ccw(c..) an arc to the next point about the centre after c; other vN are vias at no path point)
24V0: C1.2 C4.1 C30.2 C31.2 C32.1 C36.2 C37.2 C47.1 C49.1 C50.1 C52.1 C68.1 C69.1 C70.1 C71.1 C72.1 C73.1 C78.1 C80.1 C85.1 C87.1 CH1.2 CH1.4 CH3.2 CH3.6 CH4.2 CH4.4 CH5.2 CH5.4 CH6.2 CH7.2 CH8.2 CH9.2 CH10.2 CH11.3 CH11.4 CH12.2 CH12.4 CH12.6 CH13.2 CH14.2 CH15.2 CH16.2 CH17.2 D4.1 LED2.2 Q2.3 U1.1 U9.6 U9.13 U9.15 U14.13 U14.15 U16.2 U16.4 U18.2 U18.9 U18.11 U23.9 U23.11 U29.9 U29.11 U29.13 U29.15 U32.2 U32.4 U32.6 U32.8 | length 784.4
  Top Layer w0.254: U18.9@137.569,107.01 136.068,107.01 135.636,107.442 135.636,109.195 135.992,109.55 U18.11@137.569,109.55
  Top Layer w0.381: v1(96.571,52.908) 96.571,52.883 95.301,54.153 95.301,57.633 97.028,59.36 U16.4@100.632,59.36 102.286,59.36 102.743,59.817 102.743,61.392 102.235,61.9 U16.2@100.632,61.9
  Top Layer w0.508: CH1.4@38.786,55.804 40.061,54.529 ; LED2.2@40.061,50.165 40.061,54.529 ; C4.1@45.278,53.137 41.453,53.137 40.061,54.529 ; CH5.2@75.309,34.138 74.447,34.999 74.447,46.736 75.006,47.295 U9.6@76.426,47.295 78.181,47.295 80.035,49.149 80.035,50.089 ; U9.13@82.426,49.835 80.289,49.835 80.035,50.089 ; U9.15@82.426,52.375 80.543,52.375 80.035,51.867 80.035,50.089 ; v1(96.85,50.521) 97.612,49.759 97.917,49.759 ; v1(97.434,46.634) 98.019,47.219 ; U14.13@99.647,47.219 98.019,47.219 ; U14.15@99.647,49.759 97.917,49.759 ; U32.8@122.857,87.808 124.282,87.808 124.866,88.392 124.866,90.729 ; U32.6@122.857,90.348 124.485,90.348 124.866,90.729 ; U32.4@122.857,92.888 124.587,92.888 124.866,93.167 ; U32.2@122.857,95.428 124.968,95.428 v1(125.019,95.377) ; v1(123.342,102.489) 123.342,106.959 v1(123.317,106.985) 123.368,107.036 123.368,113.309 124.663,114.605 128.702,114.605 128.727,114.63 U18.2@131.569,114.63 ; 124.333,95.377 124.866,94.844 124.866,93.167 ; U18.9@137.569,107.01 137.569,105.966 138.125,105.41 v1(139.319,105.41) ; U29.9@153.52,85.166 151.74,85.166 v1(151.536,85.369) 151.536,88.163 ; U29.11@153.52,87.706 151.994,87.706 151.536,88.163 ; U29.13@153.52,90.246 151.917,90.246 151.536,90.627 ; U29.15@153.52,92.786 151.943,92.786 151.536,92.38 151.536,90.627 ; v1(153.772,37.643) 158.293,37.643 159.431,36.505 CH11.3@159.431,34.138 ; U23.9@157.203,55.982 155.55,55.982 155.169,56.363 155.169,58.014 155.677,58.522 U23.11@157.203,58.522 160.096,58.522 160.934,59.36 160.934,67.97 v1(160.858,68.047) ; v1(161.798,85.192) 161.798,89.637 164.818,92.657 CH12.2@170.409,92.657 ; 97.917,49.759 97.384,49.225 97.384,47.701 97.866,47.219 98.019,47.219 ; 124.866,90.729 124.866,93.167 ; 151.536,88.163 151.536,90.627
  Top Layer w1.27: CH1.4@38.786,55.804 37.922,55.804 CH1.4@37.77,55.956 ; CH1.2@38.786,63.731 37.188,63.731 35.865,62.408 35.865,57.861 CH1.4@37.77,55.956 ; CH3.2@50.899,34.138 50.8,34.038 50.8,30.785 ; C1.2@59.413,62.154 59.413,70.309 61.163,72.06 71.552,72.06 73.66,74.168 U1.1@73.66,78.461 ; CH3.6@66.746,34.138 66.65,34.041 66.65,30.785 ; CH5.2@75.309,34.138 75.463,33.983 75.463,30.785 ; CH5.4@83.236,34.138 83.439,33.934 83.439,30.785 ; CH4.2@91.158,34.138 91.084,34.064 91.084,30.785 ; CH17.2@97.513,124.968 97.513,127.485 98.019,127.991 117.475,127.991 ; CH4.4@99.085,34.138 99.111,34.112 99.111,30.785 ; CH7.2@107.008,34.163 106.705,33.861 106.705,30.785 ; CH16.2@109.4,124.968 109.4,127.917 ; CH13.2@117.325,124.968 117.325,127.841 117.475,127.991 ; CH6.2@118.895,34.163 118.897,34.161 118.897,30.785 ; CH8.2@133.632,124.968 133.632,127.714 133.909,127.991 ; CH9.2@141.557,124.968 141.557,127.942 141.605,127.991 ; CH10.2@149.481,124.968 149.481,127.968 149.504,127.991 ; CH11.3@159.431,34.138 159.431,30.785 ; CH15.2@170.383,68.806 172.545,68.806 173.787,67.564 ; CH14.2@170.383,80.744 173.738,80.744 173.787,80.696 ; CH12.2@170.409,92.657 173.581,92.657 173.787,92.862 ; CH12.4@170.409,100.584 173.711,100.584 173.787,100.508 ; CH12.6@170.409,108.504 173.639,108.504 173.787,108.356 ; CH1.4@37.77,55.956 36.043,54.229 36.043,45.237 43.332,37.948 43.332,32.791 45.339,30.785 50.8,30.785 ; 50.8,30.785 66.65,30.785 ; 66.65,30.785 75.463,30.785 ; 75.463,30.785 83.439,30.785 ; 83.439,30.785 91.084,30.785 ; 91.084,30.785 99.111,30.785 ; 99.111,30.785 106.705,30.785 ; 106.705,30.785 118.897,30.785 ; 117.475,127.991 133.909,127.991 ; 118.897,30.785 159.431,30.785 ; 133.909,127.991 141.605,127.991 ; 141.605,127.991 149.504,127.991 ; 149.504,127.991 158.344,127.991 173.787,112.547 173.787,108.356 ; 159.431,30.785 162.687,30.785 163.398,31.496 CH11.4@163.398,34.138 163.627,34.138 173.787,44.298 173.787,67.564 ; 173.787,67.564 173.787,80.696 ; 173.787,80.696 173.787,92.862 ; 173.787,92.862 173.787,100.508 ; 173.787,100.508 173.787,108.356
  Bottom Layer w0.381: v1(96.571,52.908) 96.596,52.883 96.596,50.775 v1(96.85,50.521)
  Bottom Layer w0.508: C30.2@47.762,39.141 50.764,39.141 C31.2@50.993,38.913 ; C32.1@59.497,39.167 59.588,39.258 C36.2@65.862,39.258 65.862,35.022 CH3.6@66.746,34.138 ; CH5.2@75.105,35.446 78.74,39.08 78.74,37.922 CH5.4@83.033,33.63 ; v1(97.434,46.634) 99.085,44.983 CH4.4@99.085,34.138 ; CH17.2@97.513,124.968 97.513,123.696 99.096,122.113 C87.1@99.096,119.786 ; CH7.2@107.008,34.163 107.61,34.765 C49.1@107.61,39.141 ; C85.1@108.214,119.736 109.4,120.922 CH16.2@109.4,124.968 ; CH13.2@117.325,124.968 117.325,124.102 119.471,121.956 C70.1@119.471,119.609 119.471,118.323 123.723,114.071 v1(123.723,113.716) ; CH6.2@118.895,34.163 119.243,34.511 C47.1@119.243,39.141 ; v1(123.317,106.985) 124.581,105.721 D4.1@133.274,105.721 133.626,105.368 Q2.3@137.603,105.368 139.277,105.368 v1(139.319,105.41) ; v1(123.342,102.489) 125.019,100.813 v1(125.019,95.377) ; C50.1@132.801,119.736 132.801,124.138 CH8.2@133.632,124.968 ; v1(151.536,85.369) 151.968,84.938 161.544,84.938 v1(161.798,85.192) ; C68.1@151.674,39.218 152.959,39.218 153.772,38.405 v1(153.772,37.643) ; C69.1@158.76,39.167 159.431,38.496 CH11.3@159.431,34.138 ; v1(160.858,68.047) 163.957,68.047 165.405,69.494 C80.1@165.405,70.094 166.692,68.806 CH15.2@170.383,68.806 ; C78.1@165.405,81.575 166.235,80.744 CH14.2@170.383,80.744 ; C71.1@165.506,90.866 167.297,92.657 CH12.2@170.409,92.657 ; C72.1@165.532,99.4 169.225,99.4 CH12.4@170.409,100.584 ; C73.1@165.659,107.909 166.253,108.504 CH12.6@170.409,108.504
  Bottom Layer w0.762: CH10.2@149.481,124.968 149.481,120.866 C52.1@150.663,119.685
  Bottom Layer w1.27: CH1.2@38.786,63.731 42.751,63.731 44.602,65.583 55.984,65.583 C1.2@59.413,62.154 ; CH3.2@50.899,34.138 51.247,34.485 C31.2@51.247,39.167
  other v2: 90.145,37.16 93.955,37.338 104.318,37.363 125.451,41.732 129.743,41.91 129.311,44.094 54.813,55.956 58.801,58.598 55.905,58.649 53.391,59.106 55.474,61.62 164.084,66.243 164.338,94.844 167.538,94.869 165.786,112.573 170.053,112.7 168.021,112.751 160.985,118.186 160.96,120.32 125.527,121.437 160.807,122.428 125.476,123.571 125.298,126.009
+3.3V: C6.2 C7.1 C8.1 C9.2 C10.2 C11.2 C14.1 C15.2 C16.2 C17.2 C20.2 C21.2 C22.1 C23.1 C24.2 C25.1 CH2.1 JP1.1 JP2.1 LED4.1 R2.2 R6.1 R8.2 R12.1 U2.2 U2.4 U3.13 U3.19 U3.32 U3.48 U3.64 U4.9 U4.24 U4.36 U4.48 U5.11 U5.14 U5.15 U6.11 U6.14 U6.15 U7.16 | length 436.9
  Top Layer w0.254: LED4.1@80.747,72.034 80.85,72.138 80.85,73.255 ; R6.1@80.85,74.752 80.85,73.255 ; 82.514,96.19 87.274,96.19 92.832,101.747 U4.9@96.204,101.747 ; C8.1@89.382,89.281 95.123,89.281 97.202,87.202 U3.64@97.202,85.087 97.202,77.797 96.692,77.287 U3.13@95.402,77.287 91.765,77.287 87.986,73.508 81.102,73.508 80.85,73.255 ; v1(91.694,66.243) 91.999,66.243 98.202,72.447 U3.19@98.202,73.987 ; v1(91.77,64.059) 93.218,65.507 105.156,65.507 106.436,66.787 C10.2@106.436,67.615 106.436,69.073 v1(107.721,70.358) ; C15.2@92.471,112.446 92.471,109.256 94.68,107.047 U4.48@97.504,107.047 ; U4.24@103.004,98.947 105.32,98.947 106.299,97.968 v1(107.645,97.968) ; U4.36@104.304,105.747 109.217,105.747 C16.2@109.779,106.309 110.937,106.309 v1(111.354,105.893) ; U3.32@104.702,73.987 106.404,73.987 107.823,72.568 v1(107.823,72.555) v1@107.823,72.542 ; U3.48@106.502,83.287 106.502,83.795 106.934,84.226 v4(112.573,84.226)
  Top Layer w0.508: R2.2@47.203,47.066 49.886,47.066 62.408,59.588 62.408,69.393 v1(62.56,69.545) 63.525,70.51 74.803,70.51 75.895,69.418 84.963,69.418 v1(86.766,67.615) ; U5.14@65.659,85.268 66.319,84.607 71.069,84.607 71.806,85.344 71.806,89.51 68.936,92.38 67.742,92.38 ; U5.15@65.659,92.38 67.742,92.38 ; U6.15@65.659,113.309 U6.14@65.659,106.197 67.615,106.197 ; v1(73.838,105.842) 73.482,106.197 67.615,106.197 ; v1(82.474,92.913) 82.54,92.979 82.54,93.812 ; R8.2@82.514,94.818 82.514,96.19 R12.1@82.514,97.485 ; R8.2@82.54,94.818 R8.2@82.54,94.767 82.54,93.812 ; v1(87.351,110.947) 89.052,112.649 v1(89.052,115.062) 89.484,115.494 C14.1@92.761,115.494 92.471,115.204 C15.2@92.471,112.446 ; C8.1@89.382,89.281 89.342,89.321 C9.2@89.342,92.1 ; v1(91.288,92.075) 91.262,92.1 C9.2@89.342,92.1 ; v1(102.667,95.555) v1(107.62,95.555) 107.503,95.438 C17.2@107.503,93.929 C11.2@107.503,91.338 110.719,91.338 116.23,85.827 118.288,85.827 119.278,84.836 119.278,80.696 118.476,79.894 JP1.1@117.373,79.894 ; v1(107.645,97.968) 110.907,101.23 JP2.1@115.037,101.23 ; 67.615,106.197 68.885,104.927 68.885,93.523 67.742,92.38 ; 82.54,93.812 82.931,93.421 88.951,93.421 89.342,93.03 C9.2@89.342,92.1
  Top Layer w0.762: v1(78.588,73.381) 78.588,72.669 79.223,72.034 LED4.1@80.747,72.034
  Bottom Layer w0.254: v1@91.694,66.116 v1(91.694,66.243) 91.77,66.167 v1(91.77,64.059) ; v1(107.721,70.358) 107.823,70.46 v1(107.823,72.555) ; v1(111.354,105.893) 110.49,105.029 110.49,102.641 111.902,101.23 JP2.1@115.037,101.23 ; v4(112.573,84.226) 112.573,81.509 114.112,79.97 117.297,79.97 JP1.1@117.373,79.894
  Bottom Layer w0.508: U2.2@62.357,72.236 62.357,69.748 v1(62.56,69.545) ; U5.11@63.119,92.888 65.151,92.888 U5.15@65.659,92.38 66.38,93.101 C20.2@70.46,93.101 72.913,93.101 C22.1@73.381,92.634 73.66,92.913 v1(82.474,92.913) ; U6.11@63.119,113.817 65.151,113.817 U6.15@65.659,113.309 69.047,113.309 C21.2@69.215,113.142 71.816,113.142 C23.1@71.933,113.258 ; v1(73.838,105.842) 85.776,105.842 87.351,107.417 v1(87.351,110.947) ; CH2.1@85.369,124.993 85.369,120.04 U7.16@83.896,118.567 85.294,118.567 87.107,116.754 C24.2@88.036,116.754 89.321,115.469 89.459,115.469 ; v1(86.766,67.615) 88.214,67.615 v1(91.77,64.059) ; v1(89.052,115.062) 89.459,115.469 ; C25.1@91.008,115.469 89.459,115.469 ; v1(91.288,92.075) 91.288,92.38 94.082,95.174 102.286,95.174 v1(102.667,95.555) ; v1(107.62,95.555) 107.62,97.942 v1(107.645,97.968)
  Bottom Layer w0.762: U2.2@62.357,72.236 U2.4@62.357,78.436 62.943,77.851 C7.1@68.174,77.851 ; U5.14@65.659,85.268 67.488,85.268 68.174,84.582 C7.1@68.174,77.851 ; v1(78.588,73.381) 74.285,77.683 C6.2@71.552,77.683 68.341,77.683 C7.1@68.174,77.851